# Altium PCB XIMUF407.PcbDoc
Units mil, origin at the board's own origin, x right, y up, seen from the top; angles counter-clockwise.
Board outline 1375 x 1380 mil, 2 copper layers (Top Layer, Bottom Layer); 42 components, 101 nets, 243 pads, 53 vias.
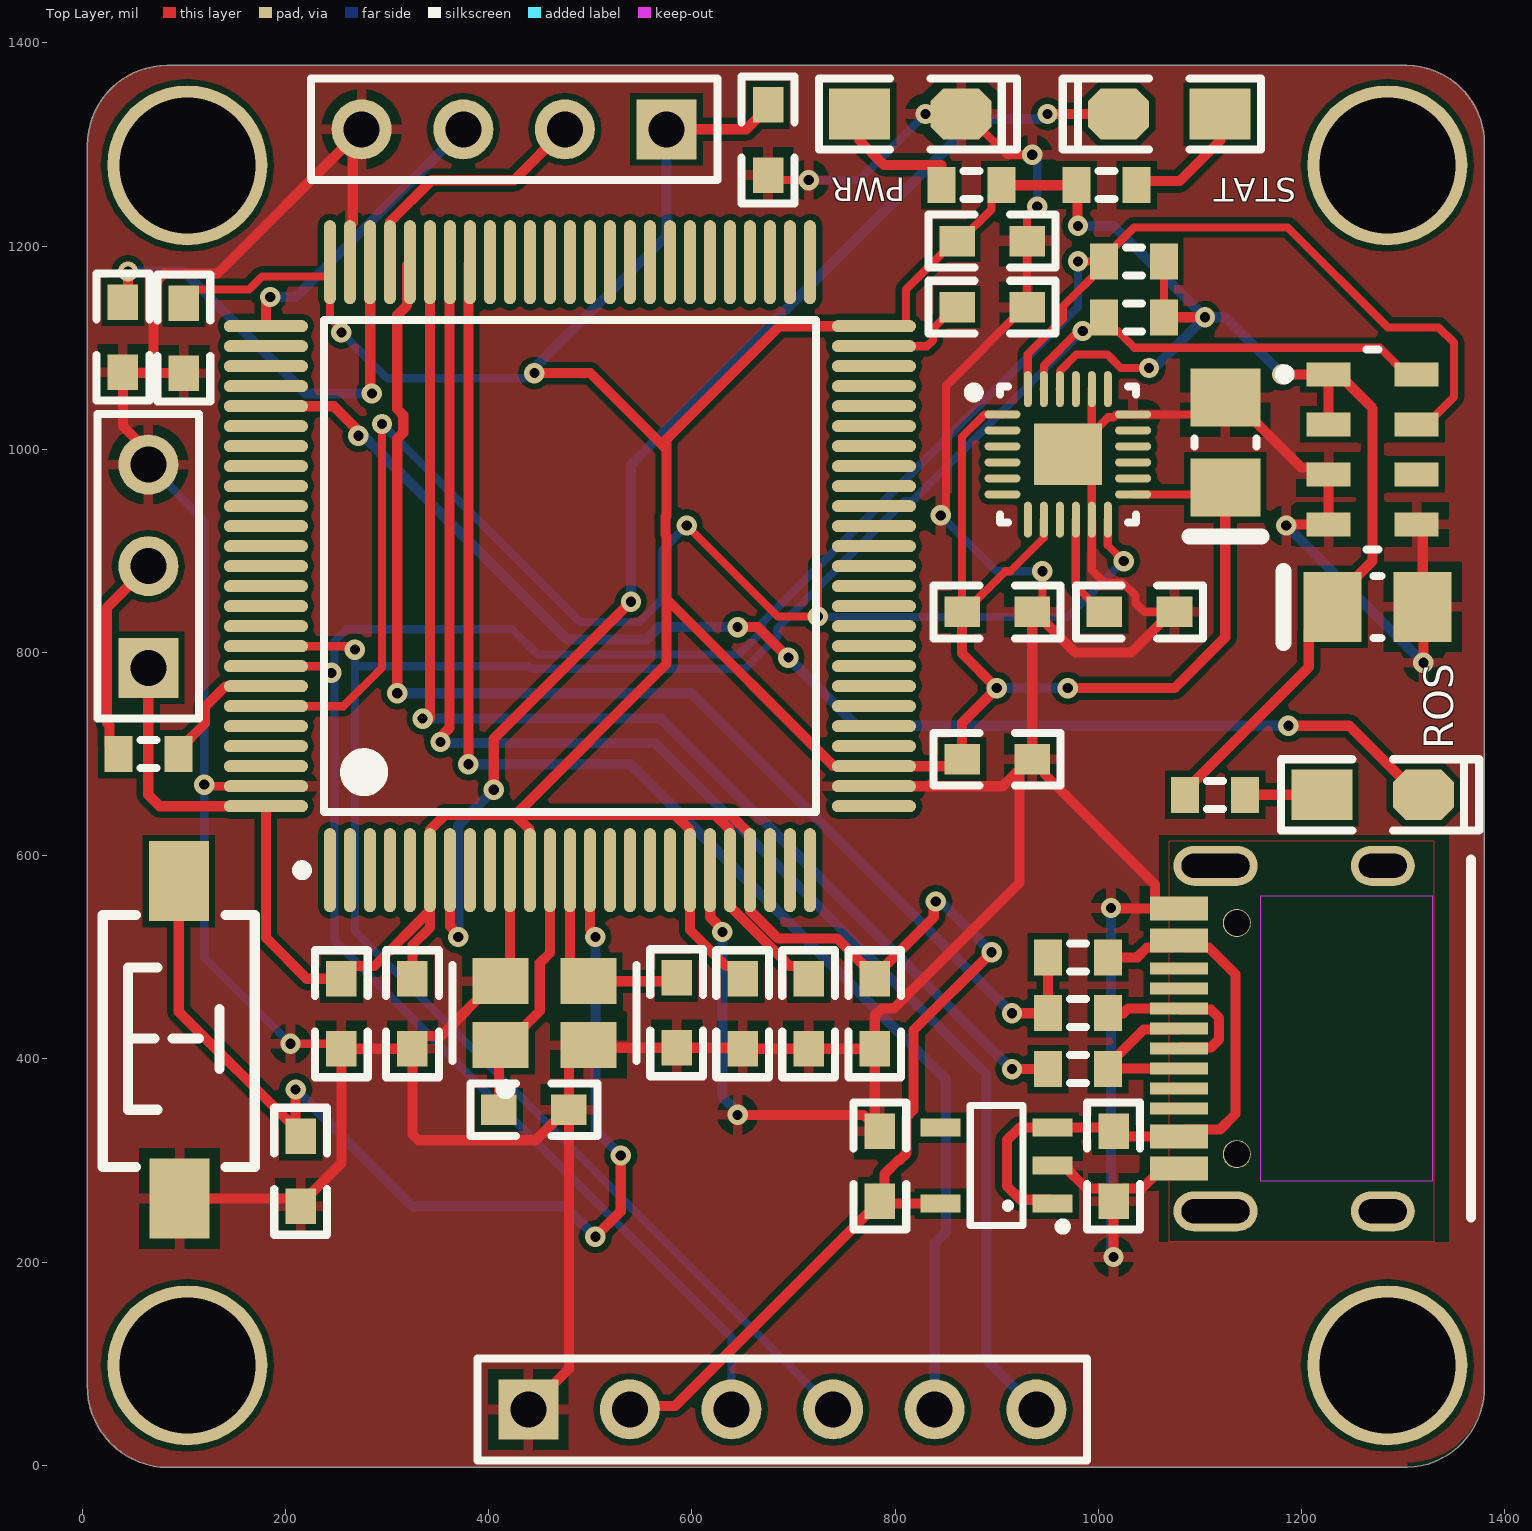
[diagram p0: Top Layer view]
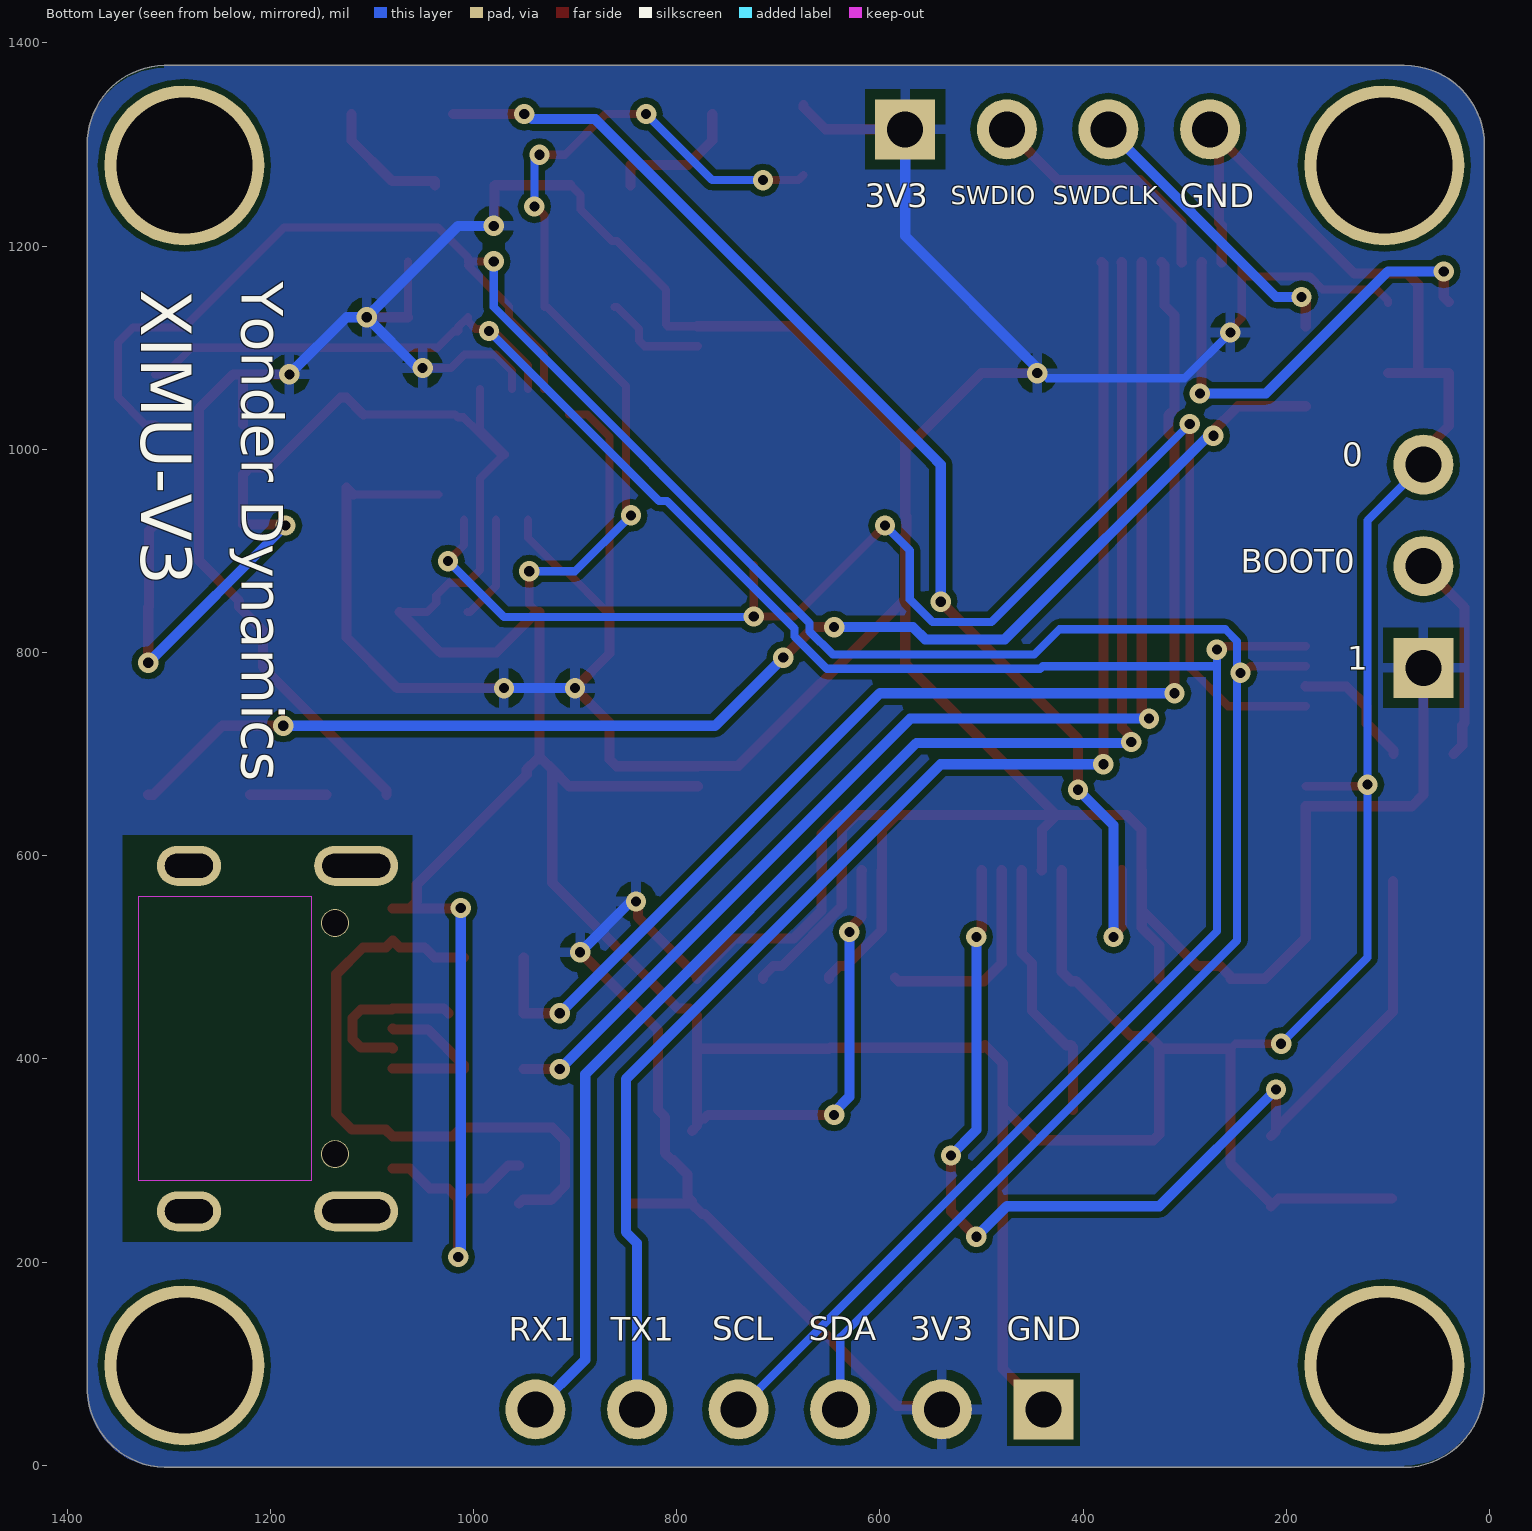
[diagram p1: Bottom Layer view, seen from below]
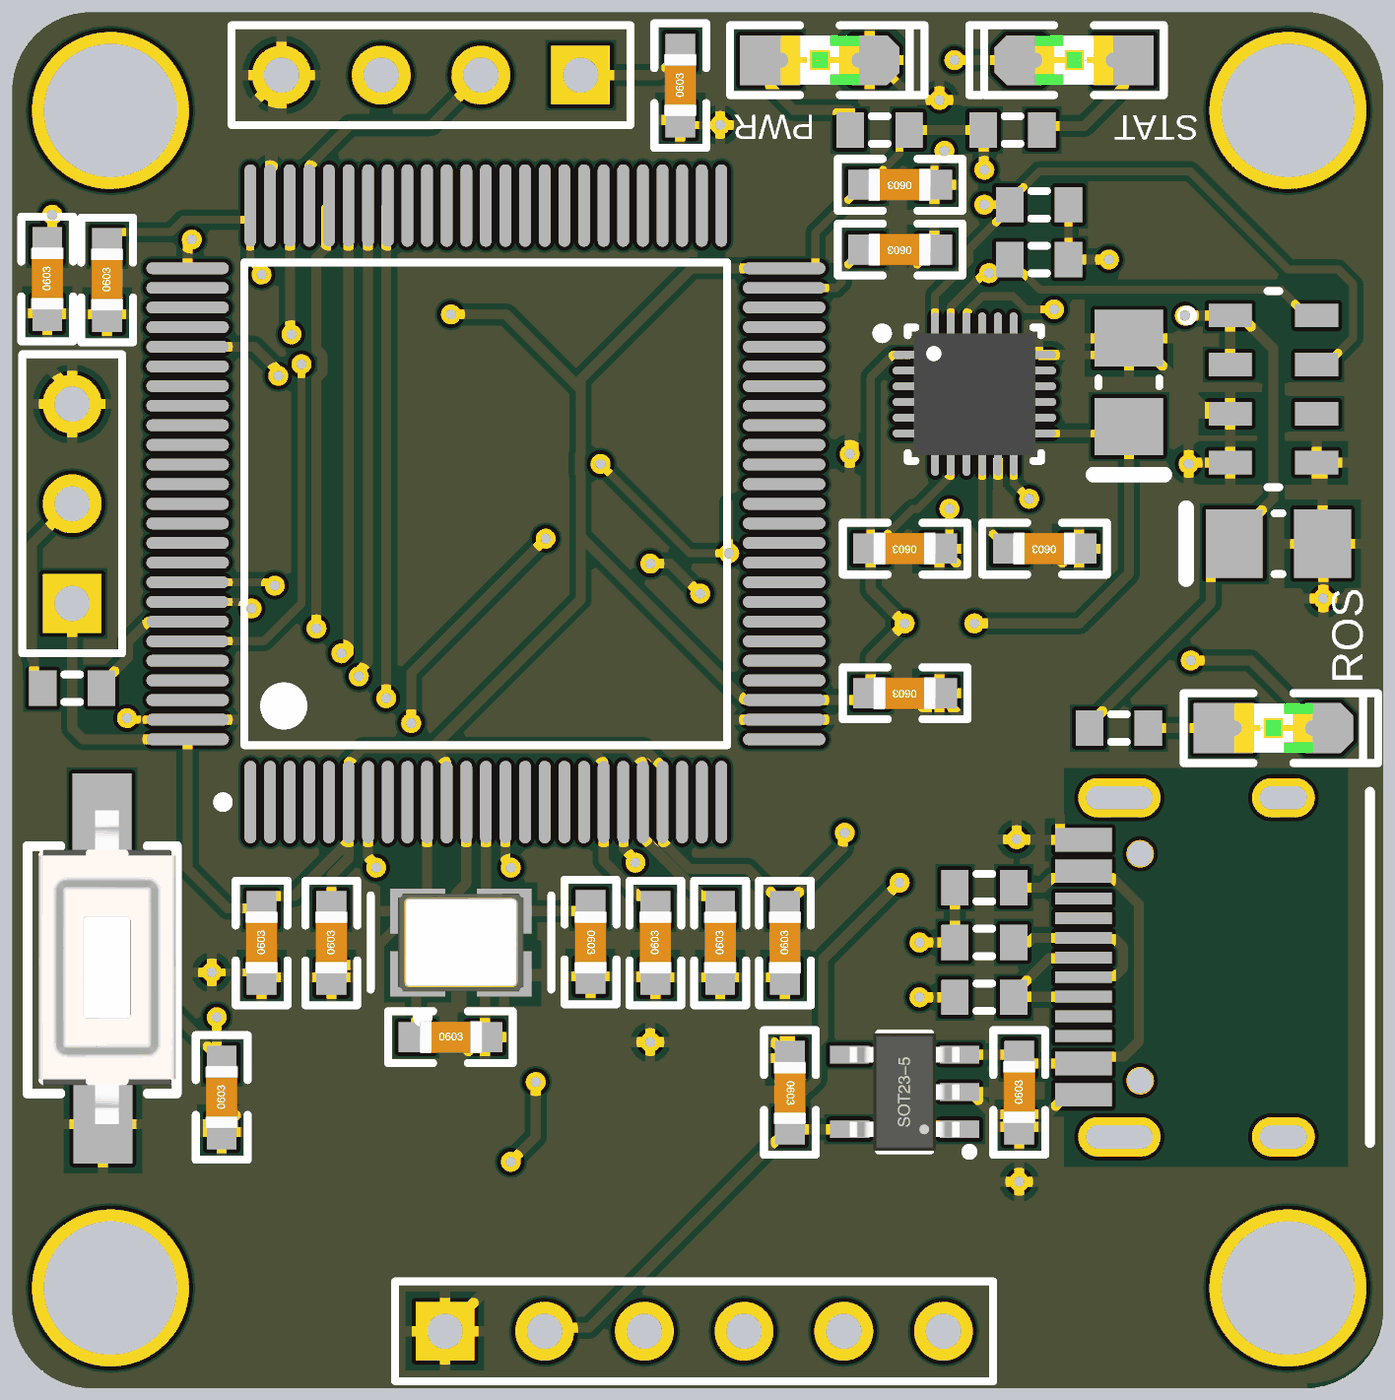
[diagram p2: 3D render of the assembled board from above, using the file's embedded part models]

## Layer stack, top to bottom
Top Solder: solder mask 0.4, Solder Resist, Dk 3.5
Top Layer: signal copper 1.4
Dielectric 1: dielectric 12.6, FR-4, Dk 4.8
Bottom Layer: signal copper 1.4
Bottom Solder: solder mask 0.4, Solder Resist, Dk 3.5

## Board outline
5,78.74 5,1299.21 cw(c83.74,1299.21) 83.74,1377.95 1304.21,1377.95 cw(c1302.74,1300.69) 1380,1299.21 1380,78.74 cw(c1301.71,76.24) 1304.21,-2.05 83.74,-2.05 cw(c84.76,77.72)

## Design rules (kind name [scope] priority, off if disabled: settings)
Clearance [All] p1: gap=6 ignorepadtopadclearanceinfootprint=FALSE except(0: Arc-Hole Track-Hole SMDPad-Hole THPad-Hole Via-Hole Fill-Hole Poly-Hole Region-Hole Text-Hole)
PolygonConnect [All] p1: connectstyle=Relief reliefconductorwidth=10 reliefentries=4 polygonreliefangle="90 Angle" airgapwidth=10
RoutingVias [All] p1: holewidth=10 width=20 viastyle="Through Hole" minholewidth=10 minwidth=10 maxholewidth=20 maxwidth=20
SolderMaskExpansion [All] p1: expansion=4 istentingtop=FALSE
Width [All] p1: maxlimit=10 minlimit=8 preferedwidth=10
30 further rules are at their usual default settings.

## Classes and differential pairs
component class XIMUF407: *1 P2 U1 U2
component class sensors: U3 U4

## Components (designator, comment, footprint, x,y, rotation, side; value= is the part's Value field where it differs from the comment)
*1 "" "New footprint 1" 1079.41,420.08 r90 top
C1 "" "C 0603" 215,290 r90 top value=104
C2 "" "C 0603" 1015,295 r90 top value=104
C3 "" "C 0603" 785,294 r270 top value=104
C4 "" "C 0603" 445,350 r0 top value=104
C5 "" "C 0603" 585,445 r270 top value=104
C6 "" "C 0603" 100,1110 r90 top value=104
C7 "" "C 0603" 895,1205 r180 top value=104
C8 "" "C 0603" 900,695 r180 top value=104
C9 "" "C 0603" 255,445 r90 top value=104
C10 "" "C 0603" 325,445 r90 top value=104
C11 "" "C 0603" 715,445 r90 top value=104
C12 "" "C 0603" 780,445 r90 top value=104
C13 "" "C 0603" 650,445 r90 top value=104
C14 "" "C 0603" 895,1140 r180 top value=104
C15 "" "C 0603" 40,1111 r90 top value=104
C16 "" "C 0603" 675,1305 r90 top value=104
C17 "" "C 0603" 1040,840 r180 top value=104
C18 "" "C 0603" 900,840 r180 top value=104
C19 "" AVX-1206-2-H1.8_L 1125,1006.78 r90 top
C20 "" AVX-1206-2-H1.8_L 1275,845 r0 top
D1 "" "LED 0805G" 815,1330 r0 top
D2 "" "LED 0805G" 1070,1330 r180 top
D3 "" "LED 0805G" 1270,660 r0 top
P1 "" HDR1X3 65,785 r90 top
P2 "" HDR1X4 575,1315 r180 top
P3 "" HDR1X6 438.98,55 r0 top
R1 "" J1-0603 65,700 r180 top value=10K
R2 "" J1-0603 875,1260 r0 top value=10K
R3 "" J1-0603 1008.31,1260 r180 top value=10K
R4 "" J1-0603 1115,660 r180 top value=10K
R5 "" J1-0603 980,500 r0 top value=1.2K
R6 "" J1-0603 980,445 r180 top value=22R
R7 "" J1-0603 980,390 r180 top value=22R
R8 "" J1-0603 1035,1185 r180 top value=4.7K
R9 "" J1-0603 1035,1130 r180 top value=4.7K
SW1 "" "TSW SMD-3*6*2.5" 95,420 r90 top
U1 "" STM-LQFP100_M 480,885 r90 top
U2 "" SOT23-5L 900,295 r90 top
U3 "" INSE-QFN-24-1700X1540TP_M 970,995 r0 top
U4 "" MSI-MS561101BA03-50-8_V 1270,1000 r0 top
Y1 "" FP-TSX-3225-MFG 455,445 r0 top

## Footprints (in the part's own frame and the unit in brackets; to place one, negate y for a bottom-side part, rotate by r counter-clockwise, add the part's x,y. Pads: shape width x height; smd on the part's side, far side on the other; paste and mask are expansions set on the pad)
AVX-1206-2-H1.8_L [mm] "Chip Capacitor, 2-Leads, Body 3.4x1.8mm, IPC High Density"
  rect 1.45x1.75 smd: 1(-1.125,0) 2(1.125,0)
  silkscreen extent -2.35,-0.9 0.1,0.9, body extent -1.7,-0.9 1.7,0.9, height 1.8
"C 0603" [mil] "无极性贴片电容"
  rect 35x30 smd: 1(-35,0) 2(34,0)
  silkscreen extent -63,-26 62,26, body extent -31,-16 31,16, height 32
FP-TSX-3225-MFG [mm]
  rect 1.4x1.15 smd paste+0 mask+0: 1(-1.1,-0.8) 2(1.1,-0.8) 3(1.1,0.8) 4(-1.1,0.8)
  silkscreen extent -2.3,-2.02 2.3,1.2, body extent -1.9,-1.48 1.9,1.48, height 0.25
HDR1X3 [mm] "Connector; Header; 3 Position"
  rect 1.5x1.5 hole 0.9: 1(0,0)
  round 1.5 hole 0.9: 2(2.54,0) 3(5.08,0)
  silkscreen extent -1.27,-1.27 6.35,1.27
HDR1X4 [mm] "Connector; Header; 4 Position"
  rect 1.5x1.5 hole 0.9: 1(0,0)
  round 1.5 hole 0.9: 2(2.54,0) 3(5.08,0) 4(7.62,0)
  silkscreen extent -1.27,-1.27 8.89,1.27
HDR1X6 [mm] "Connector; Header; 6 Position"
  rect 1.5x1.5 hole 0.9: 1(0,0)
  round 1.5 hole 0.9: 2(2.54,0) 3(5.08,0) 4(7.62,0) 5(10.16,0) 6(12.7,0)
  silkscreen extent -1.27,-1.27 13.97,1.27
INSE-QFN-24-1700X1540TP_M [mm] "QFN, 24-Leads, Body 3.1x3.1mm, Pitch 0.40mm, Thermal Pad 1.54x1.70mm, IPC Low Density"
  oval 0.9x0.2 smd: 1(-1.632,1) 2(-1.632,0.6) 3(-1.632,0.2) 4(-1.632,-0.2) 5(-1.632,-0.6) 6(-1.632,-1) 13(1.632,-1) 14(1.632,-0.6) 15(1.632,-0.2) 16(1.632,0.2) 17(1.632,0.6) 18(1.632,1)
  oval 0.2x0.9 smd: 7(-1,-1.632) 8(-0.6,-1.632) 9(-0.2,-1.632) 10(0.2,-1.632) 11(0.6,-1.632) 12(1,-1.632) 19(1,1.632) 20(0.6,1.632) 21(0.2,1.632) 22(-0.2,1.632) 23(-0.6,1.632) 24(-1,1.632)
  rect 1.7x1.54 smd: 25(0,0)
  silkscreen extent -2.47,-1.7 1.7,1.7, body extent -1.55,-1.55 1.55,1.55, height 1.05
J1-0603 [mm] "Chip Resistor, Body 1.6x0.8mm, IPC High Density"
  rect 0.7x0.9 smd: 1(-0.75,0) 2(0.75,0)
  silkscreen extent -0.2,-0.35 0.2,0.35, body extent -0.85,-0.48 0.85,0.48, height 0.9
"LED 0805G" [mil] "绿色0805LED"
  rect 60x50 smd: 1(-50,0)
  oct 60x50 smd: 2(50,0)
  silkscreen extent -90,-35 105,35, body extent -39,-25 39,25, height 32
MSI-MS561101BA03-50-8_V [mm] "SMD, 8-Leads, Body 5x3mm, Pitch 1.25mm"
  rect 1.1x0.6 smd: 1(-1.1,1.875) 2(-1.1,0.625) 3(-1.1,-0.625) 4(-1.1,-1.875) 5(1.1,-1.875) 6(1.1,-0.625) 7(1.1,0.625) 8(1.1,1.875)
  silkscreen extent -2.32,-2.5 0.15,2.5, body extent -1.5,-2.5 1.5,2.5, height 1
"New footprint 1" [mm]
  rrect100% 1x1.6 hole 1.2 slot 0.6 at 0 deg: 0(-4.32,-5.095) 0(4.32,-5.095)
  rrect100% 1x2.1 hole 1.7 slot 0.6 at 0 deg: 0(-4.32,-0.915) 0(4.32,-0.915)
  round 0.7 hole 0.65: 0(-2.89,-1.445) 0(2.89,-1.445)
  rect 0.6x1.45 smd: 1(-3.25,0) 2(-2.45,0) 11(2.45,0) 12(3.25,0)
  rect 0.3x1.45 smd: 3(-1.75,0) 4(-1.25,0) 5(-0.75,0) 6(-0.25,0) 7(0.25,0) 8(0.75,0) 9(1.25,0) 10(1.75,0)
  Keep-Out Layer region: -3.556,-6.35 3.556,-6.35 3.556,-2.032 -3.556,-2.032
  silkscreen extent -4.47,-7.3 4.47,-7.3
SOT23-5L [mm] "3x1.6x1.1mm(长宽高)"
  rect 0.45x1 smd: 1(-0.95,-1.4) 2(0,-1.4) 3(0.95,-1.4) 4(0.95,1.4) 5(-0.95,1.4)
  silkscreen extent -1.6,-1.73 1.5,0.66, body extent -1.5,-1.4 1.5,1.4, height 1.15
STM-LQFP100_M [mm] "Thin QFP, 100-Leads, Body 14x14mm, Pitch 0.5mm, IPC Low Density"
  oval 2.1x0.3 smd: 1(-7.6,6) 2(-7.6,5.5) 3(-7.6,5) 4(-7.6,4.5) 5(-7.6,4) 6(-7.6,3.5) 7(-7.6,3) 8(-7.6,2.5) 9(-7.6,2) 10(-7.6,1.5) 11(-7.6,1) 12(-7.6,0.5) 13(-7.6,0) 14(-7.6,-0.5) 15(-7.6,-1) 16(-7.6,-1.5) 17(-7.6,-2) 18(-7.6,-2.5) 19(-7.6,-3) 20(-7.6,-3.5) 21(-7.6,-4) 22(-7.6,-4.5) 23(-7.6,-5) 24(-7.6,-5.5) 25(-7.6,-6) 51(7.6,-6) 52(7.6,-5.5) 53(7.6,-5) 54(7.6,-4.5) 55(7.6,-4) 56(7.6,-3.5) 57(7.6,-3) 58(7.6,-2.5) 59(7.6,-2) 60(7.6,-1.5) 61(7.6,-1) 62(7.6,-0.5) 63(7.6,0) 64(7.6,0.5) 65(7.6,1) 66(7.6,1.5) 67(7.6,2) 68(7.6,2.5) 69(7.6,3) 70(7.6,3.5) 71(7.6,4) 72(7.6,4.5) 73(7.6,5) 74(7.6,5.5) 75(7.6,6)
  oval 0.3x2.1 smd: 26(-6,-7.6) 27(-5.5,-7.6) 28(-5,-7.6) 29(-4.5,-7.6) 30(-4,-7.6) 31(-3.5,-7.6) 32(-3,-7.6) 33(-2.5,-7.6) 34(-2,-7.6) 35(-1.5,-7.6) 36(-1,-7.6) 37(-0.5,-7.6) 38(0,-7.6) 39(0.5,-7.6) 40(1,-7.6) 41(1.5,-7.6) 42(2,-7.6) 43(2.5,-7.6) 44(3,-7.6) 45(3.5,-7.6) 46(4,-7.6) 47(4.5,-7.6) 48(5,-7.6) 49(5.5,-7.6) 50(6,-7.6) 76(6,7.6) 77(5.5,7.6) 78(5,7.6) 79(4.5,7.6) 80(4,7.6) 81(3.5,7.6) 82(3,7.6) 83(2.5,7.6) 84(2,7.6) 85(1.5,7.6) 86(1,7.6) 87(0.5,7.6) 88(0,7.6) 89(-0.5,7.6) 90(-1,7.6) 91(-1.5,7.6) 92(-2,7.6) 93(-2.5,7.6) 94(-3,7.6) 95(-3.5,7.6) 96(-4,7.6) 97(-4.5,7.6) 98(-5,7.6) 99(-5.5,7.6) 100(-6,7.6)
  silkscreen extent -7.72,-6.15 6.15,6.82, body extent -7,-7 7,7, height 1.6
"TSW SMD-3*6*2.5" [mm] "3*6*2.5mm"
  rect 2x1.5 smd: 1(-3.996,-0.02) 2(3.937,0)
  silkscreen extent -3.21,-1.9 3.09,1.9, body extent -4,-1.88 4,1.62, height 2.59

## Part data
*1: library part CMP-002-00073-3
C1 C2 C3 C4 C5 C6 C7 C8 C9 C10 C11 C12 C13 C14 C15 C16 C17 C18: library part Cap, LatestRevisionDate=17-Jul-2002, LatestRevisionNote="Re-released for DXP Platform.", Published=8-Jun-2000, Publisher="Altium Limited"
C19 C20: library part CMP-2000-07217-1, "TAJ Series Standard Tantalum, 10 uF, +/- 10%, -55 to 125 degC, 2-Pin SMD (1206), RoHS, Tape and Reel", Capacitance=10µF, ESR (Equivalent Series Resistance)=3Ohm, Lifetime @ Temp.=-, Manufacturer=AVX, Manufacturer Size Code=A, Operating Temperature=-55°C~125°C, Package / Case=1206(3216Metric), Package Description="2-Pin Chip Capacitor, Body 3.2 x 1.65 mm", Package Reference=1206, PCN Part Number=TAJSeriesSuffix08/Dec/2008, Standard Package=1, Tolerance=±10%, Voltage - Rated=10V, Catalog Drawings=TAJSeriesSideTAJSeries, Category=Capacitors, Datasheet URL=https://datasheet.ciiva.com/26341/559409-da-01-en-tacc-a-3-2-mm-x-1-6-mm-x-1-6-mm-10-uf-26341749.pdf, Datasheet Version=04/2013, EDA / CAD Models=DownloadfromAcceleratedDesigns, Family=TantalumCapacitors, Features=GeneralPurpose, Height - Seated (Max)="0.071\"(1.80mm)", Lead Spacing=-, Manufacturer URL=http://www.avx.com/, Mounting Technology=SurfaceMount, Mounting Type=SurfaceMount, Online Catalog=TAJSeries, Other Names=478-1654-6, Packaging=Digi-Reel®, Product Training Modules=ComponentSolutionsforSmartMeterApplications, Series=TAJ, Size / Dimension="0.126\"Lx0.063\"W(3.20mmx1.60mm)", Type=Molded, Voltage Rating DC=10V
D1 D2 D3: library part LED
P1: library part "Header 3", "Header, 3-Pin", LatestRevisionDate=17-Jul-2002, LatestRevisionNote="Re-released for DXP Platform.", Publisher="Altium Limited"
P2: library part "Header 4", "Header, 4-Pin", LatestRevisionDate=17-Jul-2002, LatestRevisionNote="Re-released for DXP Platform.", Publisher="Altium Limited"
P3: library part "Header 6", "Header, 6-Pin", LatestRevisionDate=17-Jul-2002, LatestRevisionNote="Re-released for DXP Platform.", Publisher="Altium Limited"
R1 R2 R3 R4 R5 R6 R7 R8 R9: library part Res3, "Resistor", LatestRevisionDate=29-May-2009, LatestRevisionNote="IPC-7351 Footprint Added.", PackageDescription="Chip Resistor", PackageReference=J1-0603, Published=8-Jun-2000, Publisher="Altium Limited"
SW1: library part SW-PB_V
U1: library part CMP-0243-00016-3, "ARM Cortex-M4 32-bit MCU+FPU, 210 DMIPS, 512 kB Flash, 192 kB Internal RAM, 82 I/Os, 100-pin LQFP, -40 to 85 degC, Tray", I/Os (High Current)=82, Manufacturer=STMicroelectronics, Operating Frequency(F) (Processor speed) (MHz)=168, PartNumber=STM32F407VET6, Supply Voltage(Vcc) max (V)=3.6, Supply Voltage(Vcc) min (V)=1.8, ComponentLink1Description="Manufacturer URL", ComponentLink1URL=http://www.st.com/web/en/home.html, ComponentLink2Description=Datasheet, ComponentLink2URL=http://www.st.com/st-web-ui/static/active/en/resource/technical/document/datasheet/DM00037051.pdf, ComponentLink3Description="Package Specification", ComponentLink3URL=http://www.st.com/st-web-ui/static/active/en/resource/technical/document/data_brief/DM00071938.pdf, Core="ARM Cortex-M4", D/A Converter=2x12-bit, DatasheetVersion="Rev. 4", FLASH Size (Prog) (kB)=512, Internal RAM Size (kB)=192, Mounting Technology="Surface Mount", PackageDescription="100-Pin Low Profile Quad Flat Package, 14 x 14 mm Body, 0.5 mm Pitch", PackageReference=LQFP100, PackageVersion="Rev. 1, 06/2013", Packing=Tray
U2: library part RT9193X_5P, ICA_MFR_NAME=RICHTEK, ICA_PARTNUM=$$2191094$$RT9193-15CU5, Part Number=TMP-13
U3: library part CMP-2100-03657-1, "9-axis MotionTracking device, 2.4 to 3,6 V, -40 to 85 degC, 24-Pin QFN, RoHS, Tape and Reel", Case/Package=QFN, Manufacturer=InvenSense, Max Operating Temperature=85degC, Max Supply Voltage=3.6V, Min Operating Temperature=-40degC, Min Supply Voltage=2.4V, Package Description="24-Pin Quad Flat No-lead Package, Body 3 x 3 mm, Pitch 0.4 mm", Package Quantity=1, Package Reference=QFN-24, Datasheet URL=http://datasheet.octopart.com/MPU-9250-InvenSense-datasheet-21859386.pdf, Datasheet Version="Rev. 1.0, 01/2014", Height=1mm, Length=3.1mm, Manufacturer URL=http://www.invensense.com/, Mount=SurfaceMount, RoHSCompliant=true, Width=3.1mm
U4: library part CMP-2000-05251-1, "Barometric Pressure Sensor, with Stainless Steel Cap, 1.8 to 3.6 V, -45 to 85 degC, 8-Pin QFN, RoHS, Tape and Reel", Manufacturer="Measurement Specialties", Operating Pressure Max=1200mbar, Operating Pressure Min=10mbar, Operating Temperature Max=85degC, Operating Temperature Min=-40degC, Package Description="8-Pin Surface Mount Device, Body 5 x 3 mm, Pitch 1.25 mm", Package Reference=MS561101BA03-50-8, Sensor Case Style=QFN, Supply Current=12.5µA, Supply Voltage Max=3.6V, Supply Voltage Min=1.8V, Connection Size=0.5mm, Datasheet URL=http://www.te.com/commerce/DocumentDelivery/DDEController?Action=srchrtrv&DocNm=MS5611-01BA03&DocType=Data+Sheet&DocLang=English&DocFormat=pdf&PartCntxt=CAT-BLPS0036, Datasheet Version=Sep-15, Manufacturer URL=http://www.meas-spec.com/, No. of Pins=8, Pressure Type=Barometric, SVHC=NoSVHC(20-Jun-2013)
Y1: library part CMP-36405-000005-1, "CRYSTAL 16.00 MHZ 9PF SMD", Frequency=16MHz, Load Capacitance=9pF, Manufacturer=EPSON, Manufacturer Part Number="TSX-3225 16.0000MF18X-AC0", Package=TSX-3225, Temperature="-40°C to +85°C", Temperature Range High=+85°C, Temperature Range Low=-40°C, Tolerance=10ppm, Automotive=No, Category=Crys, ComponentLink2Description=Datasheet, ComponentLink2URL=https://support.epson.biz/td/api/doc_check.php?dl=brief_TSX-3225&lang=en, Device Class L1="Passive Components", Device Class L2="Crystals / Oscillators", Device Class L3=Crystals, Digikey Description="CRYSTAL 16.00 MHZ 9PF SMD", Esr=60Ω, Height=0.6mm, Lead Free=Yes, Mouser Description="CRYSTAL 16.00 MHZ 9PF SMD", Octopart=https://octopart.com/tsx-3225+16.0000mf18x-ac0-epson-58756552, RoHS=TRUE, Series=TSX-3225, Stability=18ppm

## Free pads (board coordinates)
  round 157.48 hole 133.86: 3(103.43,98.43) 3(103.43,1279.53) 3(1284.53,98.43) 3(1284.53,1279.53)

## Via types
v1: diameter 20, hole 10, Top Layer to Bottom Layer, 53 vias

## Nets (pads, with @x,y where several pads share a name; then routed paths per layer and width w, separated by ;. In a path a pad name is that pad's centre, name@x,y a point inside that pad or via, vN(x,y) a via of type N, cw(c..) or ccw(c..) an arc to the next point about the centre after c; other vN are vias at no path point)
BOOT0: R1.1 U1.94 | length 125.8
  Top Layer w10: R1.1 94.53,703.94 120.83,730.24 120.83,746.59 140.79,766.54 180.44,766.54 U1.94
GND: *1.1 *1.12 C1.1 C2.1 C3.1 C4.2 C5.2 C6.1 C7.1 C8.1 C9.1 C10.1 C11.1 C12.1 C13.1 C14.1 C15.1 C16.1 C17.1 C18.1 C19.2 C20.2 D1.2 P1.3 P2.4 P3.1 SW1.1 U1.10 U1.20 U1.27 U1.74 U1.99 U2.2 U3.11 U3.18 U3.20 U3.25 U4.3 U4.4 U4.5 Y1.2 Y1.4 | length 6905.2
  Top Layer w8: v1(120,670) 121.54,668.46 U1.99 ; v1(205,415) 250,415 C9.1 ; C16.1 680,1265 v1(715,1265) ; v1(830,1330) D1.2 870,1330 910,1290 v1(935,1290) ; v1@850,939.69 850,1062.5 927.5,1140 C14.1 C7.1 930,1230 939,1239 v1(940,1239) ; C18.1@937.5,840 945,847.5 v1(945,880) ; U3.25@993.62,1018.62 U3.20 ; C17.1@1072.5,840 1045.5,840 1036.57,848.93 1036.57,856.07 1023.92,868.72 1006.28,868.72 993.62,881.38 U3.11 993.62,971.38 U3.25 973.15,995 995.2,1017.05 1009.68,1031.54 1015.14,1031.54 1017.91,1034.31 1034.19,1034.31 U3.18 C19.2@1108.3,1034.37
  Top Layer w10: P1.3 65,997.97 40,1022.97 40,1075 70,1075 ; SW1.1 207.31,262.69 C1.1 215,257.5 255,297.5 C9.1 C10.1 ; C6.1 70,1075 ; U1.74 263.46,1220.14 266.24,1222.92 P2.4@266.24,1306.24 ; P2.4 P2.4@266.24,1306.24 ; U1.10 420.94,485.75 Y1.4 406.77,476.5 352.77,422.5 335,422.5 325,412.5 C10.1 ; P3.1 479,95.02 C4.2 ; U1.20 618.14,585.44 618.14,539.56 630,527.71 v1(630,525) ; v1(645,345) 769,345 772.5,341.5 775,341.5 C3.1@780,336.5 ; U1.27 905.96,668.46 C8.1@922.5,685 ; C3.1 780,334 C3.1@780,336.5 ; U2.2 965.94,295 988.45,272.5 1005,272.5 C2.1@1015,262.5 ; U3.25 U3.25@993.62,1018.62 ; v1(1012.45,548.51) 1011.97,548.03 *1.12@1062.68,548.03 ; v1(1015,205) C2.1 C2.1@1015,262.5 ; C17.1@1072.5,840 1032.5,800 977.5,800 937.5,840 C18.1 C8.1 ; *1.1 1062.68,292.13 1043.05,272.5 1025,272.5 C2.1@1015,262.5 ; *1.12 *1.12@1062.68,548.03 ; C19.2@1108.3,1034.37 C19.2 1130.91,1051.07 1199.77,982.2 1219.88,982.2 U4.3 U4.4 1186.18,926.18 v1(1185,925) ; U4.5 1319.29,920.2 C20.2 1320,844.29 v1(1320,790) ; 70,1075 70,1162.06 80.97,1173.03 133.03,1173.03 P2.4@266.24,1306.24 ; C10.1 325,325.86 330.86,320 446.5,320 476.5,350 C4.2 ; C4.2 479,395.87 496.64,413.5 499.14,411 C5.2 649,411 C13.1 C11.1 C12.1 ; C3.1@780,336.5 780,341.5 C12.1 ; C12.1 780,442.5 787.22,449.72 798.78,449.72 922.5,573.44 C8.1@922.5,685 ; C8.1@922.5,685 932.5,695 C8.1 ; C8.1 937.5,695 947.5,685 947.5,679.94 1055.87,571.58 1055.87,554.84 *1.12@1062.68,548.03
  Bottom Layer w8: P1.3 120,930 v1(120,670) 120,500 v1(205,415) ; v1(715,1265) 765,1265 v1(830,1330) ; v1(845,935) 900,880 v1(945,880) ; v1(935,1290) 940,1285 v1(940,1239)
  Bottom Layer w10: v1(630,525) 630,362.71 645,347.71 v1(645,345) ; v1(1012.45,548.51) 1012.45,207.55 v1(1015,205) ; v1(1185,925) v1(1320,790)
INT: U1.95 U3.12 | length 1406.1
  Top Layer w8: U1.95 257.2,747.2 295,785 v1(295,1025) ; v1(595,925) 684.54,835.46 v1(724.05,835.46) 724.05,885.95 ; U3.12 1009.37,905.63 v1(1025,890)
  Bottom Layer w8: v1(295,1025) 490,830 548.28,830 570.49,852.21 570.49,900.49 v1(595,925) ; v1(724.05,835.46) 724.51,835 970,835 v1(1025,890)
MPU_19: U3.19
MPU_SDO: U3.9
MS_SDO: U4.6
Net*1_5: *1.5 *1.7 R7.1 | length 158.8
  Top Layer w10: *1.5 1010.08,390.55 R7.1 1009.53,393.94 1044.61,429.02 1078.5,429.02 *1.7
Net*1_6: *1.6 *1.8 R6.1 | length 164.4
  Top Layer w10: 1024.53,445 1029.13,449.61 *1.8 1080.31,448.7 1110.63,448.7 1118.95,440.38 1118.95,419.46 1110.64,411.14 1080.31,411.14 *1.6
NetC14_2: C14.2 U1.49 | length 104.5
  Top Layer w8: U1.49 831.54,1101.54 837.19,1107.19 837.19,1118.69 858.5,1140 C14.2
NetC15_2: C15.2 U1.73 | length 451.8
  Top Layer w10: C15.2 45,1150 v1(45,1175) ; U1.73 283.5,1183.87 283.5,1056.5 v1(285,1055)
  Bottom Layer w10: v1(45,1175) 100,1175 220,1055 v1(285,1055)
NetC17_2: C17.2 U3.10 | length 103.9
  Top Layer w8: U3.10 977.87,865.63 1003.5,840 C17.2
NetD1_1: D1.1 R2.1 | length 136.4
  Top Layer w10: D1.1 765,1304 789,1280 845.47,1280 R2.1
NetD2_1: D2.1 R3.1 | length 128.7
  Top Layer w10: R3.1 1037.83,1264 1080,1264 1120,1304 D2.1
NetD3_1: D3.1 R4.1 | length 75.5
  Top Layer w10: R4.1 D3.1
NetP1_2: P1.2 R1.2 | length 206.3
  Top Layer w10: R1.2 26.69,708.78 26.69,728.31 24.47,730.53 24.47,844.47 P1.2
OSCIN: C4.1 U1.12 Y1.1 | length 259.5
  Top Layer w10: C4.1 410,411.81 Y1.1 416.61,413.5 450.25,447.14 450.25,494.19 460.32,504.26 U1.12
OSCOUT: C5.1 U1.13 Y1.3 | length 205.4
  Top Layer w10: U1.13 480,494.13 497.64,476.5 Y1.3 581.5,476.5 C5.1
PA0: U1.23
PA1: U1.24
PA2: U1.25
PA3: U1.26
PA4: U1.29
PA5: U1.30
PA6: U1.31
PA7: U1.32
PA8: U1.67
PA11: R7.2 U1.70 | length 1214.5
  Top Layer w10: v1(335,735) 341.77,735 342.2,735.44 U1.70 ; v1(915,390) R7.2
  Bottom Layer w10: v1(335,735) 570,735 v1(915,390)
PA12: R5.1 R6.2 U1.71 | length 1260.3
  Top Layer w10: v1(310,760) 310,1010.3 316,1016.3 316,1033.7 310,1039.7 310,1132.04 319.74,1141.78 319.74,1181.43 U1.71 ; v1(915,445) R6.2 R5.1
  Bottom Layer w10: v1(310,760) 600,760 v1(915,445)
PA15: U1.77
PB0: U1.35
PB1: U1.36
PB2: U1.37
PB3: U1.89
PB4: U1.90
PB5: U1.91
PB9: U1.96
PB10: U1.47
PB11: U1.48
PB12: U1.51
PB13: U1.52
PB14: U1.53
PB15: U1.54
PC0: U1.15
PC1: U1.16
PC2: U1.17
PC3: U1.18
PC4: U1.33
PC5: U1.34
PC6: U1.63
PC7: U1.64
PC8: U1.65
PC9: U1.66
PC10: U1.78
PC11: U1.79
PC12: D3.2 U1.80 | length 1313.8
  Top Layer w10: U1.80 247.52,1042.48 274.19,1015.81 v1(271.74,1013.37) ; v1(645,825) 665,825 v1(695,795) ; v1(1187.12,727.88) 1247.12,727.88 1315,660 D3.2
  Bottom Layer w10: v1(271.74,1013.37) 273.37,1013.37 275,1015 477,813 555.33,813 567.33,825 v1(645,825) ; v1(695,795) 762.12,727.88 v1(1187.12,727.88)
PC13: D2.2 U1.7 | length 1227.5
  Top Layer w10: U1.7 361.89,530.48 370,522.37 v1(370,520) ; v1(405,665) 405,715 v1(540,850) ; v1(950,1330) D2.2
  Bottom Layer w10: v1(370,520) 370,630 v1(405,665) ; v1(540,850) 540,985 550,995 590,1035 880,1325 942.29,1325 947.29,1330 v1(950,1330)
PC14: U1.8
PC15: U1.9
PD0: U1.81
PD1: U1.82
PD2: U1.83
PD3: U1.84
PD4: U1.85
PD5: U1.86
PD6: U1.87
PD7: U1.88
PD8: U1.55
PD9: U1.56
PD10: U1.57
PD11: U1.58
PD12: U1.59
PD13: U1.60
PD14: U1.61
PD15: U1.62
PE0: U1.97
PE1: U1.98
PE2: U1.1
PE3: U1.2
PE4: U1.3
PE5: U1.4
PE6: U1.5
PE7: U1.38
PE8: U1.39
PE9: U1.40
PE10: U1.41
PE11: U1.42
PE12: U1.43
PE13: U1.44
PE14: U1.45
PE15: U1.46
RESET: C1.2 SW1.2 U1.14 | length 1078
  Top Layer w10: SW1.2 95,446.5 C1.2@210,331.5 ; v1(210,370) C1.2@210,331.5 ; C1.2 210,329 C1.2@210,331.5 ; U1.14 499.69,528.02 505,522.71 v1(505,520) ; v1(505,225) 530,250 v1(530,305)
  Bottom Layer w10: v1(210,370) 325,255 475,255 v1(505,225) ; v1(505,520) 505,330 v1(530,305)
RX1: P3.6 U1.69 | length 1499.4
  Top Layer w10: v1(352.5,711.9) 352.5,716.9 361.54,725.95 361.54,1183.87 U1.69
  Bottom Layer w10: v1(352.5,711.9) 353.4,711 564,711 890,385 890,103.98 P3.6
SCL: P3.4 R9.2 U1.92 U3.23 U4.8 | length 2331.9
  Top Layer w8: U1.92 261.67,806.26 265.04,802.89 v1(268.29,802.89) ; U3.23 U3.23 946.44,1082.59 980.25,1116.4 v1(984.69,1116.4) 982.47,1118.62 998.03,1118.62 1005.47,1126.06 R9.2 1015,1120.47 1015,1116.54 1015.25,1116.28 1019.19,1116.28 1035.47,1100 1277.28,1100 1303.46,1073.82 U4.8
  Bottom Layer w8: v1(268.29,802.89) 268.29,525.69 P3.4 ; 270,786.57 439.69,786.57 442.26,784 652.08,784 684,815.92 684,823.7 809.36,949.05 817.34,949.05 v1(984.69,1116.4)
SDA: P3.3 R8.2 U1.93 U3.24 U4.7 | length 2612.3
  Top Layer w8: U1.93 235.18,786.57 241.75,780 v1(245,780) ; U3.24 930.63,1093.99 965,1128.36 965,1140.59 1005.47,1181.06 1003.5,1183.03 1001.54,1185 v1(980,1185) ; R8.2 1005.47,1188.94 1035,1218.46 1186.54,1218.46 1285,1120 1335,1120 1350,1105 1350,1051.46 1323.15,1024.61 U4.7
  Bottom Layer w8: P3.3 638.98,126.02 248.29,516.71 248.29,811.17 260.01,822.89 423.17,822.89 448.06,798 646.28,798 669.14,820.86 669.14,829.14 980,1140 v1(980,1185)
SWDCLK: P2.3 U1.76 | length 288.9
  Top Layer w10: U1.76 180.79,1145.79 v1(185,1150)
  Bottom Layer w10: v1(185,1150) 210,1150 P2.3
SWDIO: P2.2 U1.72 | length 249.6
  Top Layer w10: U1.72 303.18,1184.56 303.18,1224.21 343.88,1264.91 424.91,1264.91 P2.2
TX1: P3.5 U1.68 | length 1422.8
  Top Layer w10: v1(380,690) 380,1182.64 U1.68
  Bottom Layer w10: v1(380,690) 540,690 850,380 850,229.65 838.98,218.63 P3.5
VCC3V3: C3.2 C6.2 C7.2 C8.2 C9.2 C10.2 C11.2 C12.2 C13.2 C16.2 C18.2 C19.1 C20.1 P1.1 P2.1 P3.2 R2.2 R3.2 R4.2 R8.1 R9.1 U1.6 U1.11 U1.19 U1.21 U1.22 U1.28 U1.50 U1.75 U1.100 U2.5 U3.1 U3.8 U3.13 U3.22 U4.1 U4.2 | length 7152.8
  Top Layer w8: C6.2 100,1146.5 111,1157.5 164.22,1157.5 176.72,1170 242.02,1170 243.78,1171.76 U1.75@243.78,1176.76 ; U1.75@243.78,1170 U1.75@243.78,1176.76 ; U1.75 U1.75@243.78,1176.76 ; v1(255,1115) 255,1118.25 243.78,1129.47 U1.75@243.78,1176.76 ; U1.50 808.89,1121.22 810.65,1122.98 810.65,1157.15 858.5,1205 C7.2 863.5,1205 894.75,1236.25 894.75,1250.22 R2.2 ; U3.1 905.68,1034.31 887.94,1034.31 866,1012.36 C18.2 868.5,840 908.5,880 913.37,880 946.32,912.94 946.32,930.69 U3.8 ; U3.22 962.19,1059.32 962.19,1077.06 978.31,1093.18 1008.93,1093.18 1022.11,1080 v1(1050,1080) ; U3.13 C19.1@1118.14,955.63 ; R9.1 R8.1
  Top Layer w10: P1.1 65,660 76.22,648.78 U1.100 180.79,519.21 221,479 C9.2 255,481.5 265,491.5 287.57,491.5 U1.6@341.86,545.79 ; C10.2 325,512.08 342.2,529.28 342.2,545.79 U1.6 342.55,586.13 342.55,625.79 356.76,640 426.07,640 ; U1.11 440.28,585.44 440.28,625.79 426.07,640 ; v1(445,1075) 500.15,1075 575,1000.15 ; P3.2 542.48,58.5 583.5,58.5 772.5,247.5 775,247.5 785,257.5 C3.2 ; P2.1 653.5,1315 675,1336.5 C16.2 ; C13.2 650,481.5 640,491.5 633.5,491.5 598.11,526.89 U1.19 597.76,586.13 597.76,625.79 583.56,640 ; C11.2 715,481.5 705,491.5 696.33,491.5 637.48,550.35 U1.21 637.13,586.13 637.13,625.79 622.92,640 ; U1.50 686.22,1121.22 575,1010 575,1000.15 ; C12.2 C12.2@780,481.5 ; v1(840,555) 838.09,553.09 838.09,539.59 C12.2@780,481.5 ; U2.5 787.4,257.6 C3.2 ; C18.2 866,799 v1(900,765) 866,731 C8.2 859.15,688.15 U1.28 778.87,688.5 739.21,688.5 575,852.7 ; v1(895,505) 818.2,428.2 818.2,349.82 811.38,343 811.38,307.32 804.56,300.5 803.31,300.5 789.45,286.64 789.45,264.45 C3.2 ; R2.2 R3.2 979.39,1259.39 979.39,1220.61 v1(980,1220) ; v1(970,765) 1075,765 1125,815 C19.1 C19.1@1118.14,955.63 ; R9.1 v1(1105,1130) ; R4.2 1085.47,663.94 1207.16,785.63 1207.16,821.46 C20.1 1230.71,850.91 1270,890.2 1270,1040.35 1236.54,1073.82 U4.1 ; v1(1181.18,1073.82) U4.1 ; U4.2 U4.1 ; 426.07,640 583.56,640 ; 426.07,640 575,788.93 575,852.7 ; 575,852.7 575,915.3 574,916.3 574,933.7 575,934.7 575,1000.15 ; 583.56,640 622.92,640 ; 622.92,640 638.39,640 657.17,621.22 U1.22 657.51,585.44 657.51,545.79 684.65,518.64 742.86,518.64 C12.2@780,481.5
  Bottom Layer w8: v1(255,1115) 300,1070 435,1070
  Bottom Layer w10: v1@442.5,1077.5 575,1210 P2.1 ; v1(840,555) 845,555 v1(895,505) ; v1(900,765) v1(970,765) ; v1(980,1220) 1015,1220 v1(1105,1130) ; v1(1050,1080) 1055,1080 v1(1105,1130) ; v1(1181.18,1073.82) 1125,1130 v1(1105,1130)
VCC5V: *1.2 *1.11 C2.2 R5.2 U2.1 U2.3 | length 623.9
  Top Layer w10: U2.1 951.26,261.46 923.54,261.46 910,275 910,320 922.4,332.4 U2.3 1011.6,332.4 C2.2 1020.38,323.62 *1.2 1086.22,330.43 1119.58,330.43 1135,345.86 1135,483.39 1108.67,509.72 1086.22,509.72 *1.11 1072.6,509.72 1048.03,509.72 1038.31,500 R5.2
XCL: U3.7
XDA: U3.21
pads on no net: *1.0 *1.3 *1.4 *1.9 *1.10 U2.4 U3.2 U3.3 U3.4 U3.5 U3.6 U3.14 U3.15 U3.16 U3.17

## Polygon pours and split planes (outlines as drawn)
GND on Top Layer "GND_L01_P000" (solid, pour order 0): 1304.21,1377.95 83.74,1377.95 ccw(c83.74,1299.21) 5,1299.21 5,76.69 ccw(c83.74,76.69) 83.74,-2.05 1304.21,-2.05 1304.21,2.95 ccw(c1304.21,78.74) 1380,78.74 1380,1302.16 ccw(c1304.21,1302.16)
no net on Top Layer "NONET_L01_P001" (solid, pour order 1): 1070,615 1330,615 1330,220 1070,220
VCC3V3 on Bottom Layer "VCC3V3_L02_P002" (solid, pour order 2): 83.74,1377.95 1304.21,1377.95 1304.21,1375 cw(c1304.21,1299.21) 1380,1299.21 1380,73.74 cw(c1304.21,73.74) 1304.21,-2.05 83.74,-2.05 83.74,0 cw(c83.74,78.74) 5,78.74 5,1299.21 cw(c83.74,1299.21)

## Other copper
Top Layer:
  pour cut-out: 1070,620 1345,620 1345,220 1060,220 1060,620
Bottom Layer:
  pour cut-out: 1060,620 1345,620 1345,220 1060,220
  pour cut-out: 1093.78,564.25

## Silkscreen, mask and mechanical layers (free items; w line width, h text height)
Top Overlay:
  text "PWR" at 810,1275 h40 r180
  text "STAT" at 1195,1274.57 h40 r180
  text "ROS" at 1359.47,705 h50 r90
Bottom Overlay:
  text "SWDCLK" at 430,1235.32 h30
  text "SWDIO" at 530,1235.32 h30
  text "GND" at 305,1230.43 h40
  text "3V3" at 615,1230.46 h40
  text "Yonder Dynamics" at 1241.85,1164.97 h70 r90
  text "XIMU-V3" at 1327,1157 h50 r90
  text "0" at 145,975.43 h40
  text "BOOT0" at 245,870.43 h40
  text "1" at 140,775 h40
  text "GND" at 475,115.43 h40
  text "3V3" at 570,115.46 h40
  text "SDA" at 670,115.43 h40
  text "SCL" at 765,115.43 h40
  text "TX1" at 865,115 h40
  text "RX1" at 965,115 h40
Mechanical 1:
  the board outline again, w10